# Altium PCB SPT3G_LCBoardRev0.PcbDoc (part 1 of 3)
Units mil, origin at the board's own origin, x right, y up, seen from the top; angles counter-clockwise.
Board outline 7438.98 x 1969 mil, 6 copper layers (Top Layer, Signal Layer 1, Internal Plane 1, Internal Plane 2, Signal Layer 2, Bottom Layer), stack 61.6 mil thick; 29 components, 149 nets, 701 pads, 136 vias.
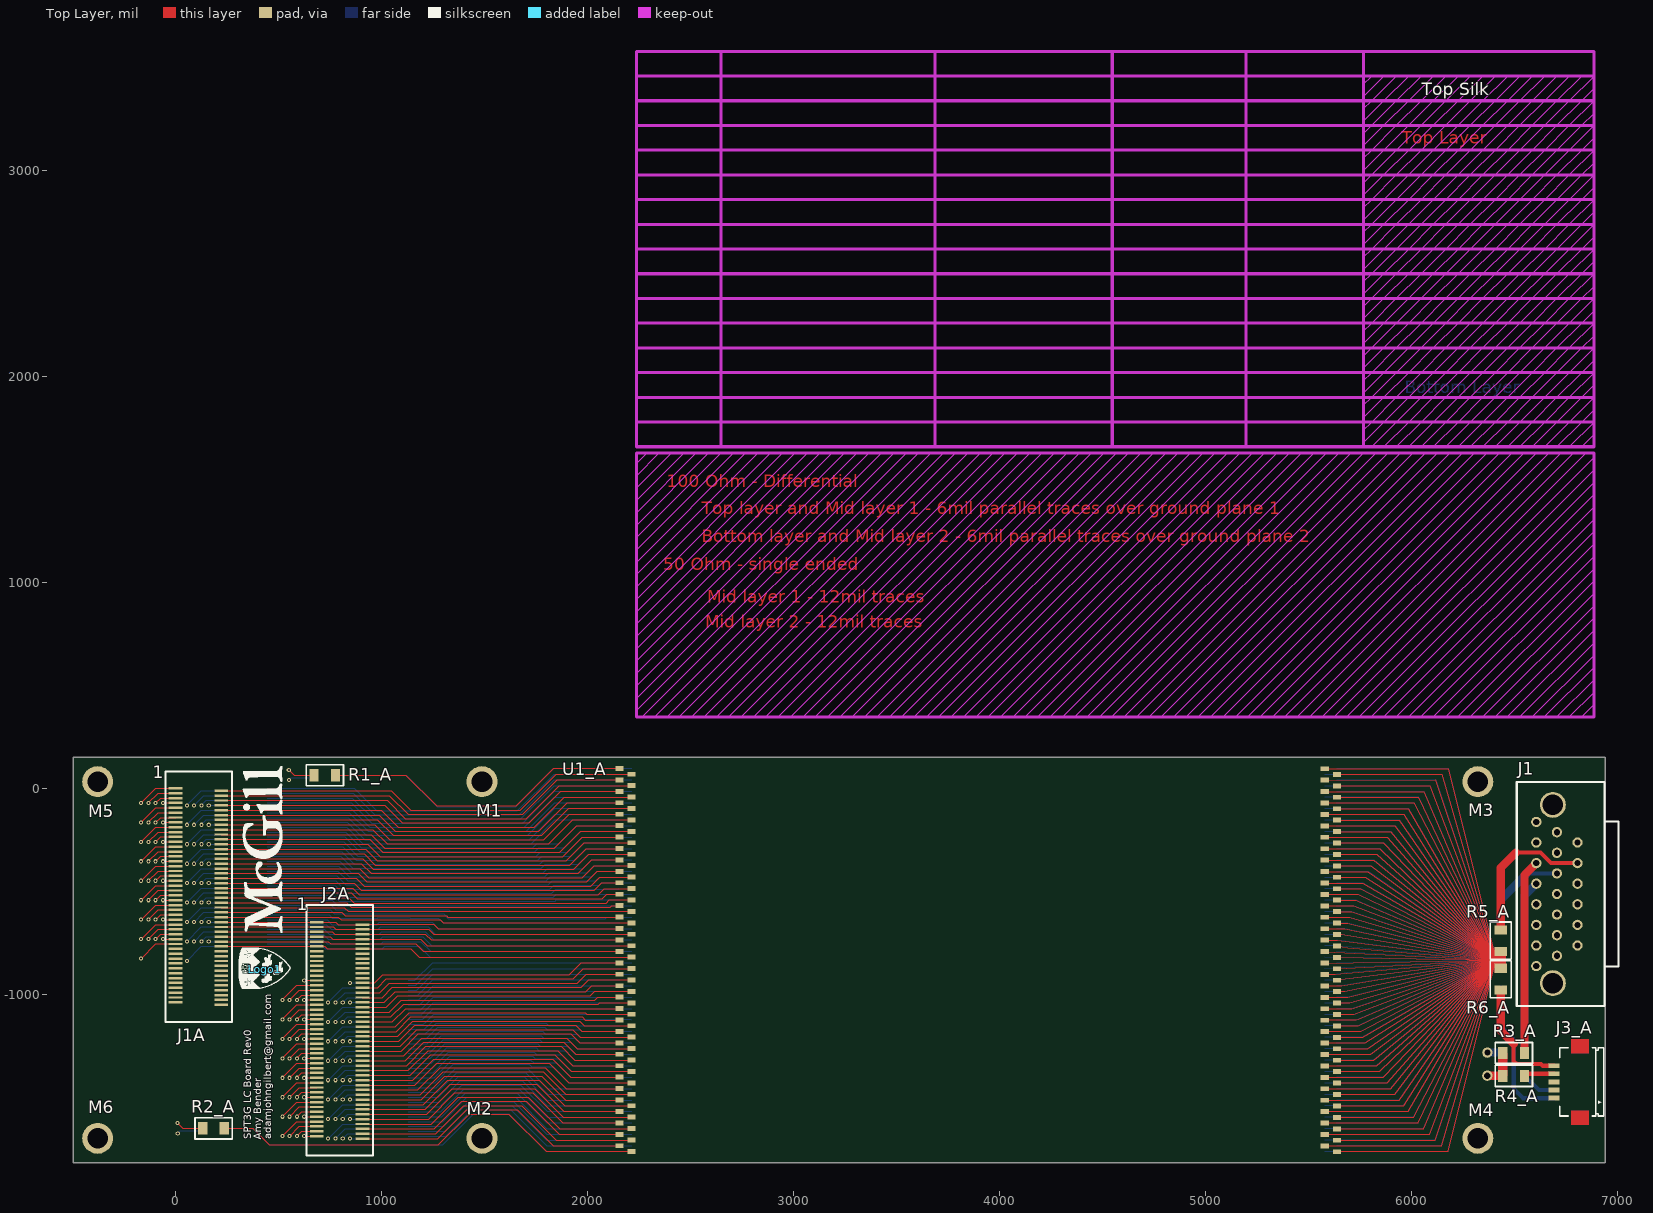
[diagram p0: Top Layer view]
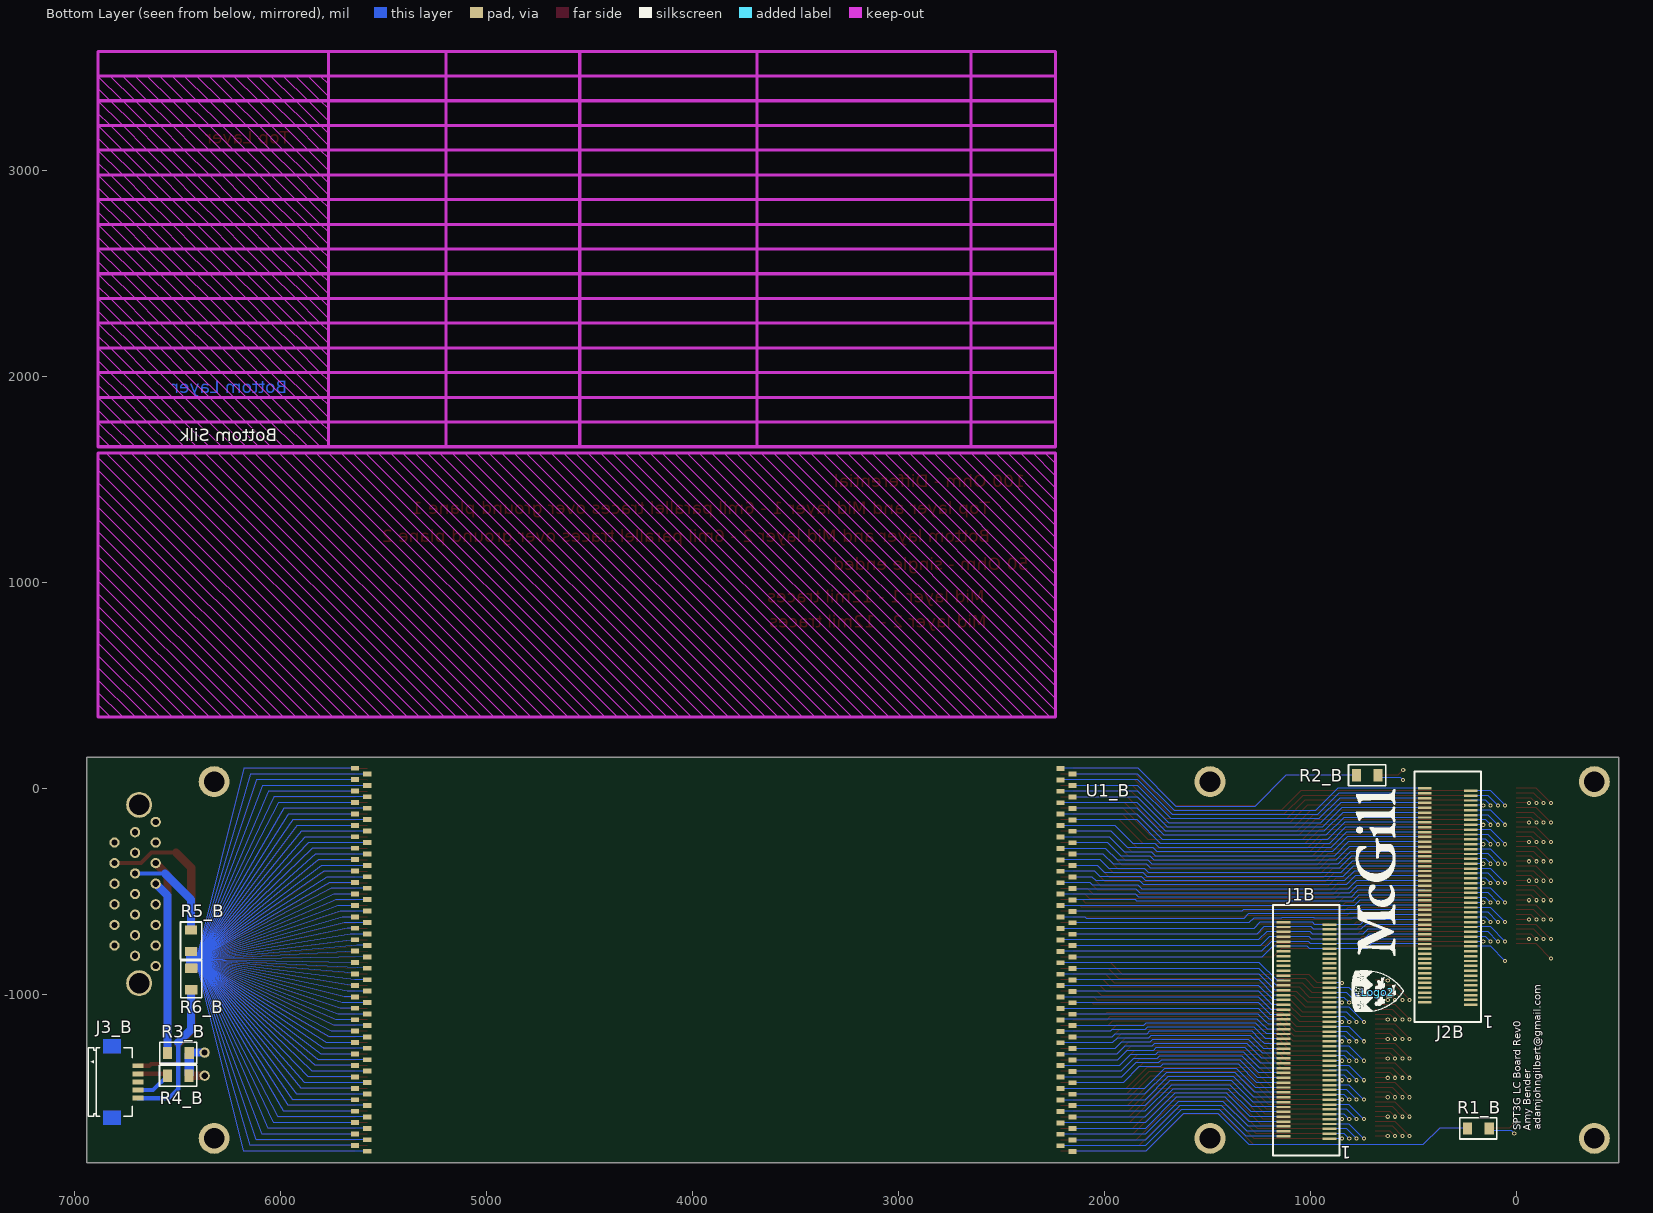
[diagram p1: Bottom Layer view, seen from below]
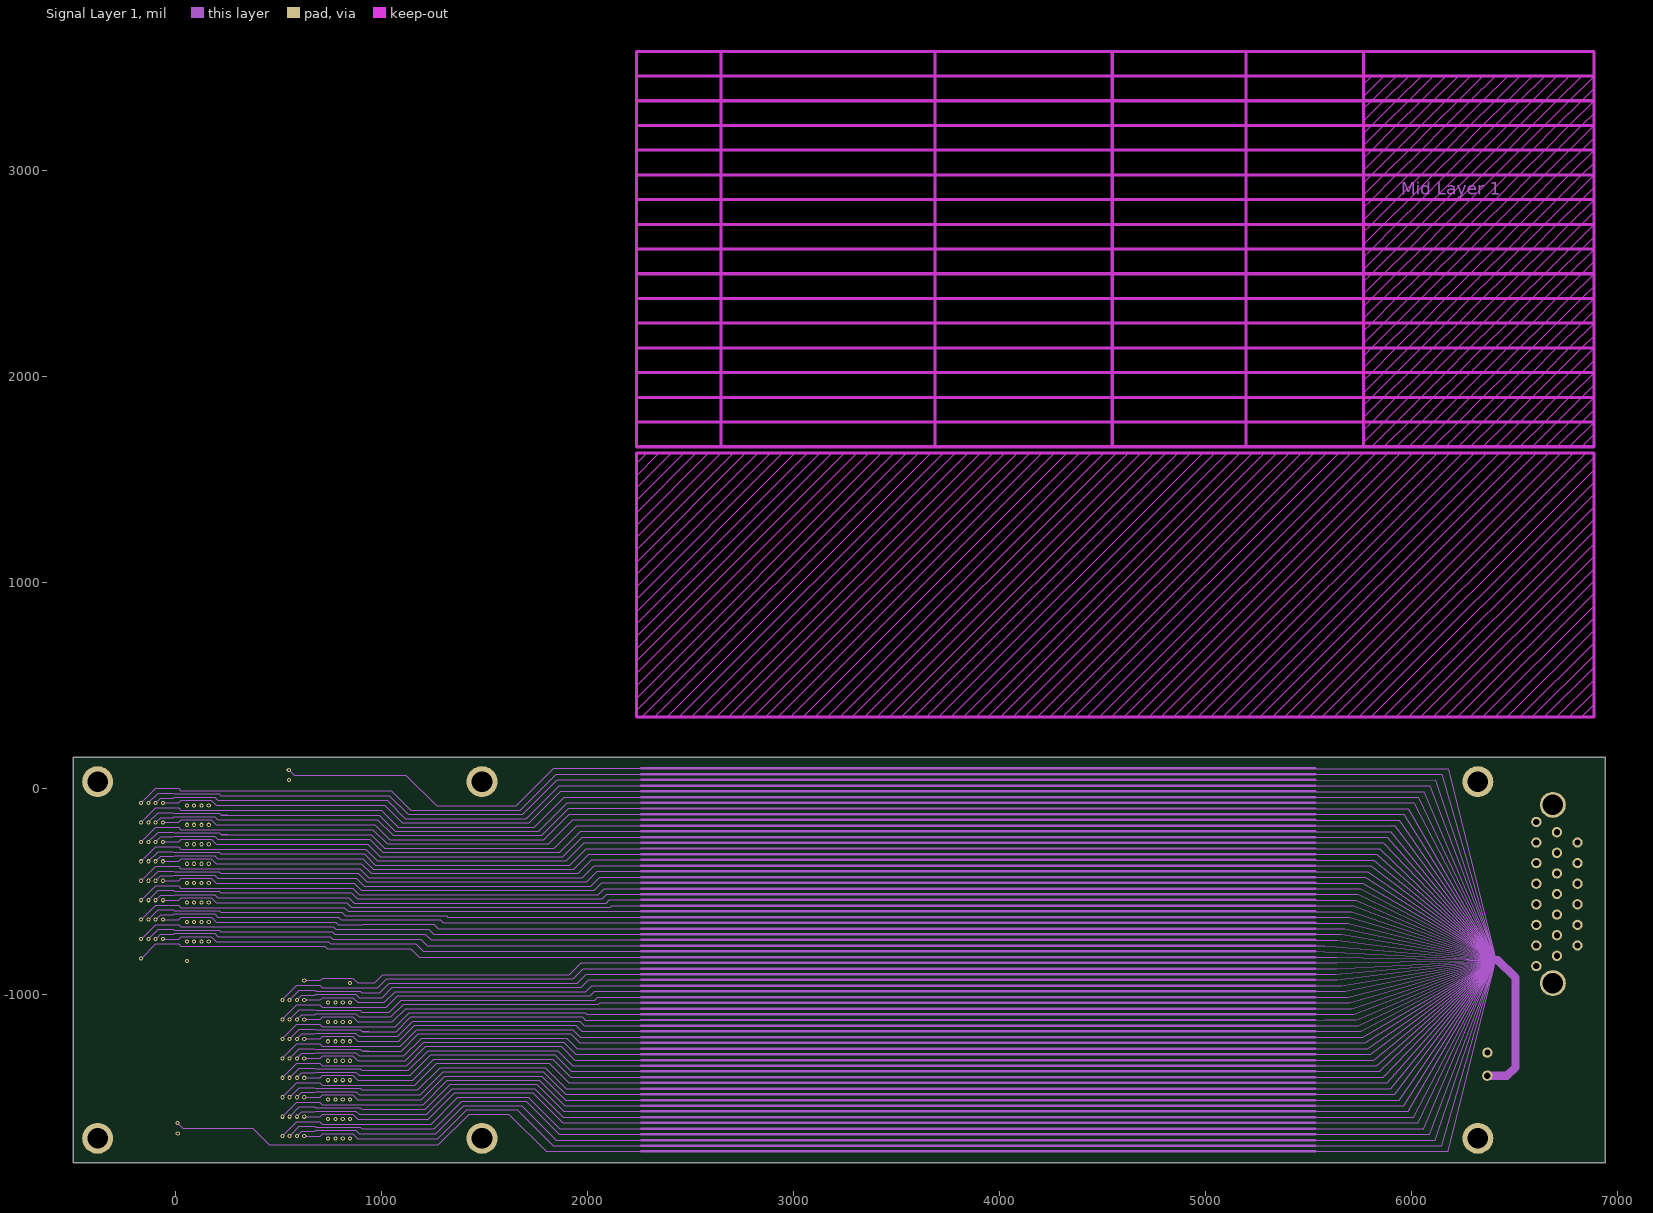
[diagram p2: Signal Layer 1]
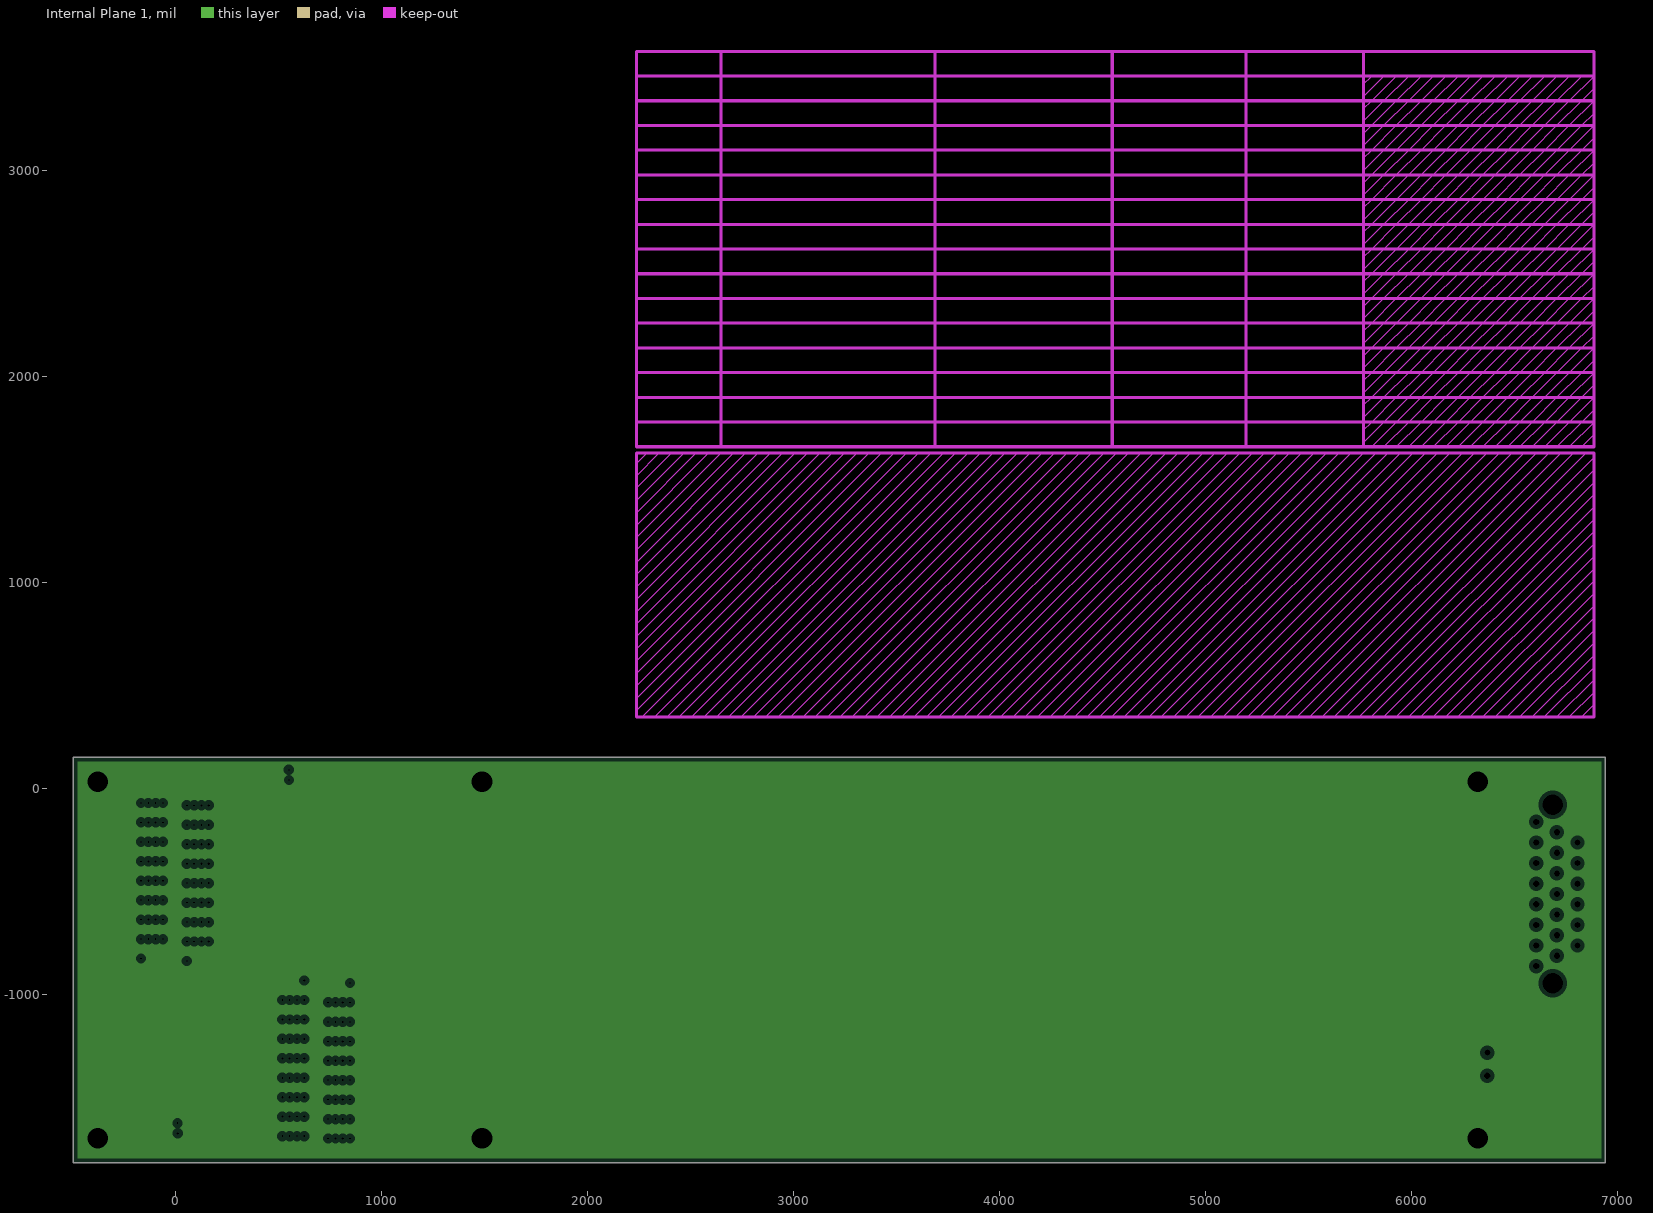
[diagram p3: Internal Plane 1, clearances drawn from the general rule]
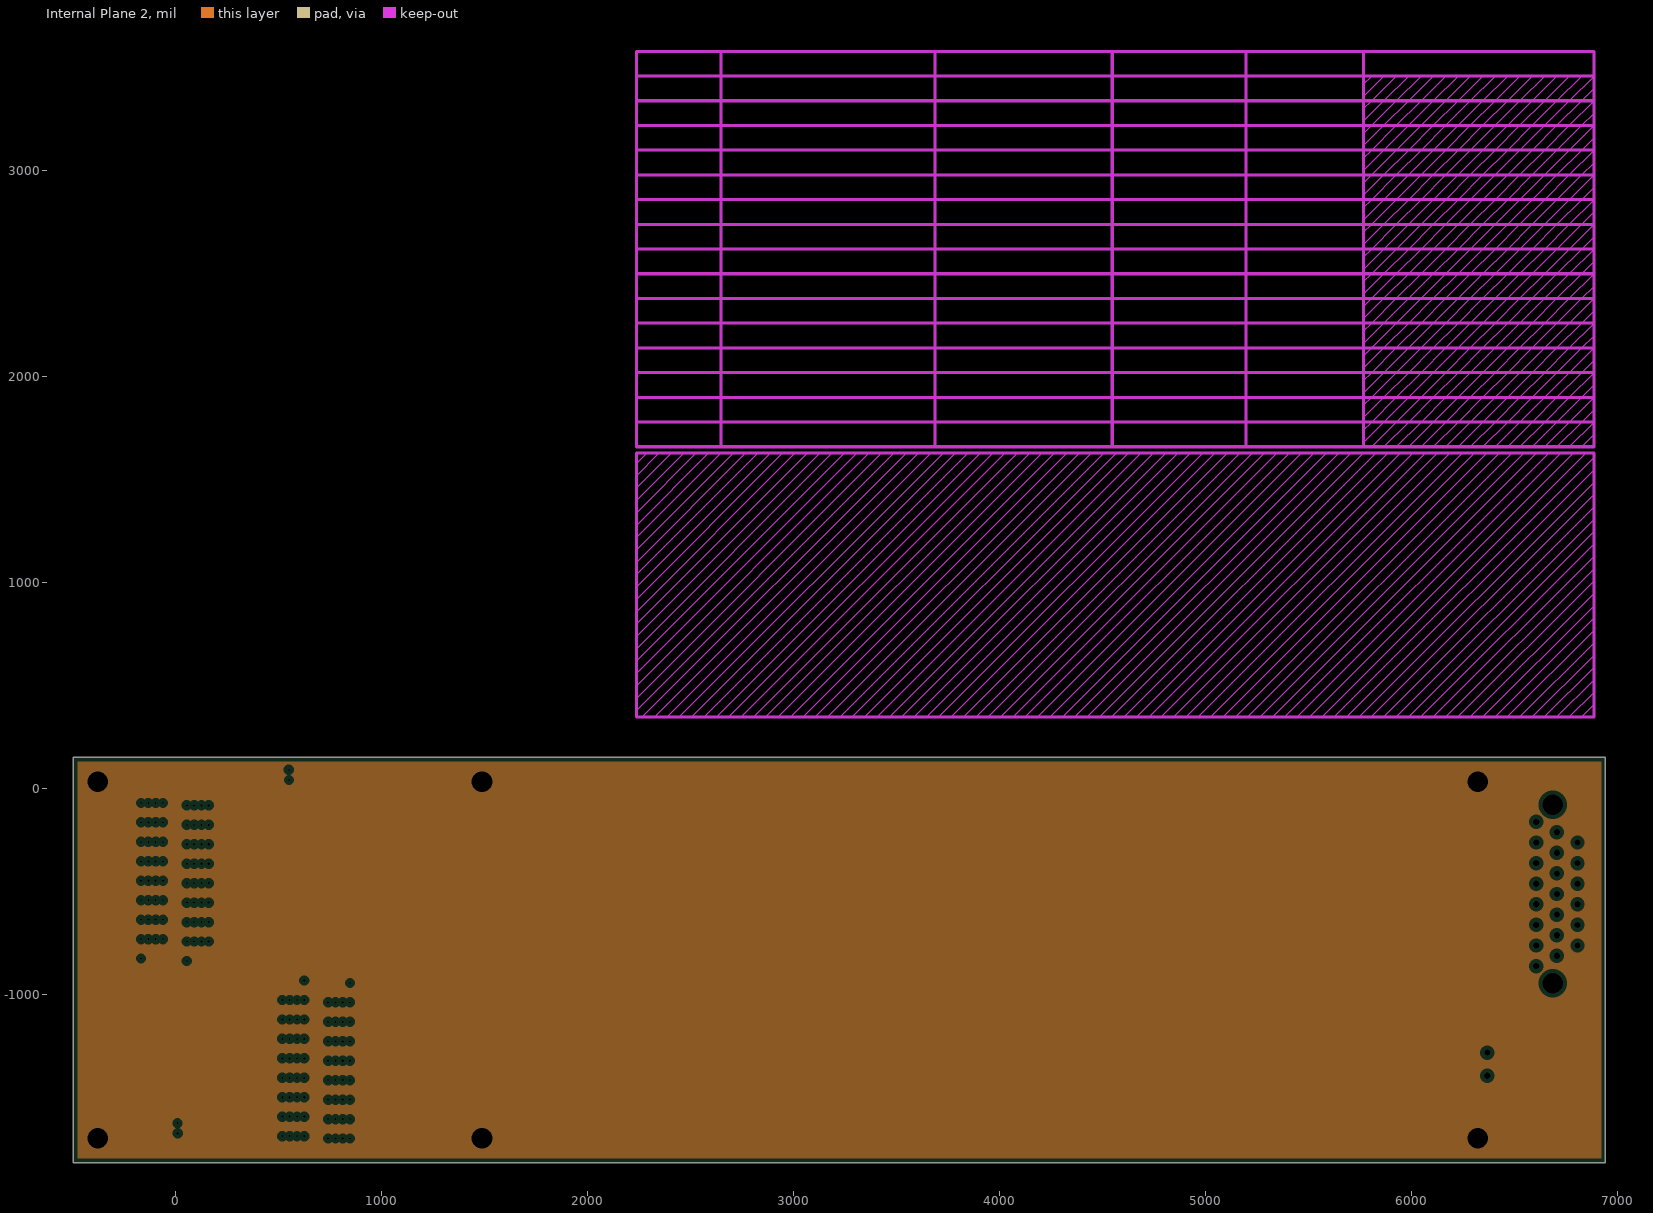
[diagram p4: Internal Plane 2, clearances drawn from the general rule]
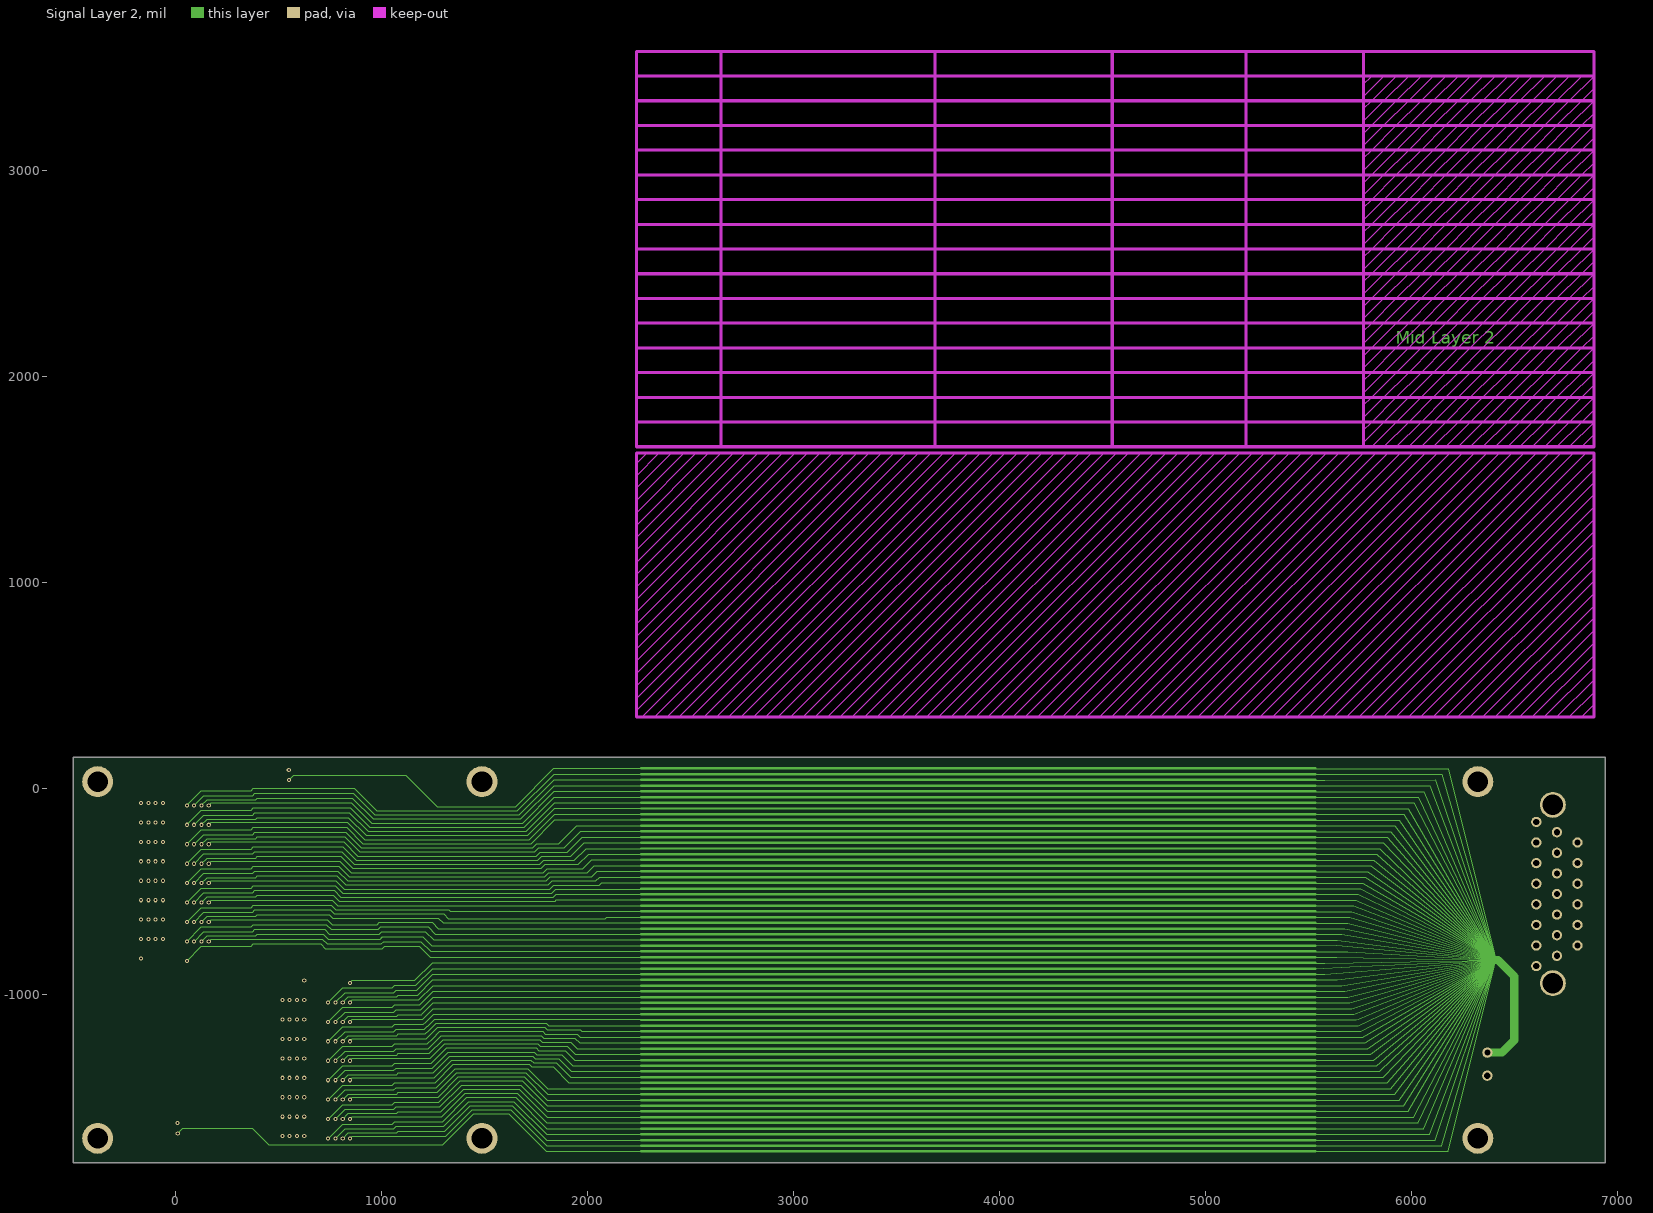
[diagram p5: Signal Layer 2]

## Layer stack, top to bottom
Top Solder: solder mask 0.4, Solder Resist, Dk 3.5
Top Layer: signal copper 1.4
Dielectric 1: core 4, FR-4, Dk 4.2
Signal Layer 1: signal copper 0.7
Dielectric 3: prepreg 9, Dk 4.2
Internal Plane 1: plane copper 0.7, net GND
Dielectric 4: core 30, Dk 4.2
Internal Plane 2: plane copper 0.7, net GND
Dielectric 5: prepreg 9, Dk 4.2
Signal Layer 2: signal copper 0.7
Dielectric 2: core 4, Dk 4.2
Bottom Layer: signal copper 1.4
Bottom Solder: solder mask 0.4, Solder Resist, Dk 3.5

## Board outline
-496.38,-1818.5 6942.6,-1818.5 6942.6,150.5 -496.38,150.5

## Design rules (kind name [scope] priority, off if disabled: settings)
Clearance [All] p1: gap=6
ComponentClearance [All] p1 off: gap=10 collisioncheckmode=3 verticalgap=10 showdistances=FALSE
HoleSize [All] p1: absolutevalues=TRUE maxlimit=200 minlimit=1 maxpercent=80.000 minpercent=20.000
MinimumSolderMaskSliver [All] p1: minsoldermaskwidth=3
PlaneClearance [All] p1: clearance=20
PlaneConnect MountingHoleRelief [(ObjectKind = 'Pad') And (Layer = 'MultiLayer') And (AsMils(HoleDiameter) = 120)] p1: planeconnectstyle=Direct reliefexpansion=20 reliefentries=4 reliefconductorwidth=30 reliefairgap=10
PlaneConnect [All] p2: planeconnectstyle=Relief reliefexpansion=20 reliefentries=4 reliefconductorwidth=10 reliefairgap=10
PolygonConnect [All] p1: connectstyle=Relief reliefconductorwidth=10 reliefentries=4 polygonreliefangle="90 Angle" airgapwidth=10
RoutingVias [All] p1: holewidth=28 width=50 viastyle="Through Hole" minholewidth=28 minwidth=50 maxholewidth=28 maxwidth=50
SilkToBoardRegionClearance [All] p1 off:
SilkToSilkClearance [All] p1: silktosilkclearance=0
SilkToSolderMaskClearance [IsPad] p1: minsilkscreentomaskgap=3 clearancetoexposedcopper=TRUE
SolderMaskExpansion [All] p1: expansion=4
UnpouredPolygon [All] p1: allowunpoured=FALSE
Width [All] p1: maxlimit=100 minlimit=3 preferedwidth=6
21 further rules are at their usual default settings.

## Classes and differential pairs
component class A: J3_A R1_A R2_A R3_A R4_A R5_A R6_A U1_A
component class B: J3_B R1_B R2_B R3_B R4_B R5_B R6_B U1_B
component class S1: J1A J2A
component class S2: J1B J2B
channel class LCs: A B
component class TopLevelSchem: J1 Logo1 Logo2 M1 M2 M3 M4 M5 M6

## Components (designator, comment, footprint, x,y, rotation, side; value= is the part's Value field where it differs from the comment)
J1 "Glenair MWDM2L-21SCBRP-.110" MWDM2L-21SCBRP-.110 6707.24,-213.17 r270 top
J1A "ZIF Connector" LCBOARD_ZIFCON#1 33.46,0 r270 top
J1B "ZIF Connector" LCBOARD_ZIFCON#2 941.89,-1700.79 r90 bottom
J2A "ZIF Connector" LCBOARD_ZIFCON#1 719.45,-649.61 r270 top
J2B "ZIF Connector" LCBOARD_ZIFCON#2 255.91,-1051.18 r90 bottom
J3_A "FH-12-5S-1SH(55)" FH-12-5S-1SH(55) 6820.77,-1425.96 r90 top (schematic designator J3)
J3_B "FH-12-5S-1SH(55)" FH-12-5S-1SH(55) 6820.77,-1425.7 r270 bottom (schematic designator J3)
Logo1 "McGillLogo1" McGillLogo1 432.2,-879.04 r90 top
Logo2 "McGillLogo1" McGillLogo1 674.38,-990.59 r90 bottom
M1 "MountingHole" MOUNTINGHOLE#1 1487.9,32.5 r0 top
M2 "MountingHole" MOUNTINGHOLE#1 1487.9,-1699.5 r0 top
M3 "MountingHole" MOUNTINGHOLE#1 6323.6,32.5 r0 top
M4 "MountingHole" MOUNTINGHOLE#1 6323.6,-1699.5 r0 top
M5 "MountingHole" MOUNTINGHOLE#2 -348.71,-58.7 r0 top
M6 "MountingHole" MOUNTINGHOLE#3 -342.9,-1631.21 r0 top
R1_A "Res1206" 1206 672,64 r0 top (schematic designator R1)
R1_B "Res1206" 1206 132.39,-1651.5 r0 bottom (schematic designator R1)
R2_A "Res1206" 1206 131.94,-1651.23 r0 top (schematic designator R2)
R2_B "Res1206" 1206 672.1,63.2 r0 bottom (schematic designator R2)
R3_A "Res1206" 1206 6444.69,-1285.09 r0 top (schematic designator R3)
R3_B "Res1206" 1206 6444.48,-1284.85 r0 bottom (schematic designator R3)
R4_A "Res1206" 1206 6444.75,-1396.59 r0 top (schematic designator R4)
R4_B "Res1206" 1206 6444.97,-1395.95 r0 bottom (schematic designator R4)
R5_A "Res1206" 1206 6435.05,-792.87 r90 top (schematic designator R5)
R5_B "Res1206" 1206 6435.44,-792.88 r90 bottom (schematic designator R5)
R6_A "Res1206" 1206 6435.05,-874.02 r270 top (schematic designator R6)
R6_B "Res1206" 1206 6435,-873.35 r270 bottom (schematic designator R6)
U1_A "LC68_wafer" 68xLC 2154.8,96.32 r0 top (schematic designator U1)
U1_B "LC68_wafer" 68xLC 2155,-1763 r0 bottom (schematic designator U1)

## Footprints (in the part's own frame and the unit in brackets; to place one, negate y for a bottom-side part, rotate by r counter-clockwise, add the part's x,y. Pads: shape width x height; smd on the part's side, far side on the other; paste and mask are expansions set on the pad)
68xLC [mm]
  rect 1x0.6 smd: 1(0,0) 2(1.5,-0.705) 3(0,-1.41) 4(1.5,-2.115) 5(0,-2.82) 6(1.5,-3.525) 7(0,-4.23) 8(1.5,-4.935) 9(0,-5.64) 10(1.5,-6.345) 11(0,-7.05) 12(1.5,-7.755) 13(0,-8.46) 14(1.5,-9.165) 15(0,-9.87) 16(1.5,-10.575) 17(0,-11.28) 18(1.5,-11.985) 19(0,-12.69) 20(1.5,-13.395) 21(0,-14.1) 22(1.5,-14.805) 23(0,-15.51) 24(1.5,-16.215) 25(0,-16.92) 26(1.5,-17.625) 27(0,-18.33) 28(1.5,-19.035) 29(0,-19.74) 30(1.5,-20.445) 31(0,-21.15) 32(1.5,-21.855) 33(0,-22.56) 34(1.5,-23.265) 35(0,-23.97) 36(1.5,-24.675) 37(0,-25.38) 38(1.5,-26.085) 39(0,-26.79) 40(1.5,-27.495) 41(0,-28.2) 42(1.5,-28.905) 43(0,-29.61) 44(1.5,-30.315) 45(0,-31.02) 46(1.5,-31.725) 47(0,-32.43) 48(1.5,-33.135) 49(0,-33.84) 50(1.5,-34.545) 51(0,-35.25) 52(1.5,-35.955) 53(0,-36.66) 54(1.5,-37.365) 55(0,-38.07) 56(1.5,-38.775) 57(0,-39.48) 58(1.5,-40.185) 59(0,-40.89) 60(1.5,-41.595) 61(0,-42.3) 62(1.5,-43.005) 63(0,-43.71) 64(1.5,-44.415) 65(0,-45.12) 66(1.5,-45.825) 67(0,-46.53) 68(1.5,-47.235) 69(88.5,-47.26) 70(87,-46.555) 71(88.5,-45.85) 72(87,-45.145) 73(88.5,-44.44) 74(87,-43.735) 75(88.5,-43.03) 76(87,-42.325) 77(88.5,-41.62) 78(87,-40.915) 79(88.5,-40.21) 80(87,-39.505) 81(88.5,-38.8) 82(87,-38.095) 83(88.5,-37.39) 84(87,-36.685) 85(88.5,-35.98) 86(87,-35.275) 87(88.5,-34.57) 88(87,-33.865) 89(88.5,-33.16) 90(87,-32.455) 91(88.5,-31.75) 92(87,-31.045) 93(88.5,-30.34) 94(87,-29.635) 95(88.5,-28.93) 96(87,-28.225) 97(88.5,-27.52) 98(87,-26.815) 99(88.5,-26.11) 100(87,-25.405) 101(88.5,-24.7) 102(87,-23.995) 103(88.5,-23.29) 104(87,-22.585) 105(88.5,-21.88) 106(87,-21.175) 107(88.5,-20.47) 108(87,-19.765) 109(88.5,-19.06) 110(87,-18.355) 111(88.5,-17.65) 112(87,-16.945) 113(88.5,-16.24) 114(87,-15.535) 115(88.5,-14.83) 116(87,-14.125) 117(88.5,-13.42) 118(87,-12.715) 119(88.5,-12.01) 120(87,-11.305) 121(88.5,-10.6) 122(87,-9.895) 123(88.5,-9.19) 124(87,-8.485) 125(88.5,-7.78) 126(87,-7.075) 127(88.5,-6.37) 128(87,-5.665) 129(88.5,-4.96) 130(87,-4.255) 131(88.5,-3.55) 132(87,-2.845) 133(88.5,-2.14) 134(87,-1.435) 135(88.5,-0.73) 136(87,-0.025)
  body extent 2.32,-47.55 86.18,0.29, height 2
1206 [mil]
  rect 45x60 smd: 1(0,0) 2(105,0)
  silkscreen extent -37,-51 144,51
FH-12-5S-1SH(55) [mil] "FH-12-5S-1SH(55)"
  rect 24x52 smd: 1(79,128) 2(40,128) 3(0,128) 4(-39.37,128) 5(-78.74,128)
  Top Layer region: 209,44 138,44 138,-43.31 209,-43.31
  Top Layer region: -137.79,44 -208.66,44 -208.66,-43.31 -137.79,-43.31
  silkscreen extent -165,-114 166,99
LCBOARD_ZIFCON#1 [mm]
  rect 0.3x1.7 smd: 1(0,-0.85) 2(0.3,4.8) 3(0.6,-0.85) 4(0.9,4.8) 5(1.2,-0.85) 6(1.5,4.8) 7(1.8,-0.85) 8(2.1,4.8) 9(2.4,-0.85) 10(2.7,4.8) 11(3,-0.85) 12(3.3,4.8) 13(3.6,-0.85) 14(3.9,4.8) 15(4.2,-0.85) 16(4.5,4.8) 17(4.8,-0.85) 18(5.1,4.8) 19(5.4,-0.85) 20(5.7,4.8) 21(6,-0.85) 22(6.3,4.8) 23(6.6,-0.85) 24(6.9,4.8) 25(7.2,-0.85) 26(7.5,4.8) 27(7.8,-0.85) 28(8.1,4.8) 29(8.4,-0.85) 30(8.7,4.8) 31(9,-0.85) 32(9.3,4.8) 33(9.6,-0.85) 34(9.9,4.8) 35(10.2,-0.85) 36(10.5,4.8) 37(10.8,-0.85) 38(11.1,4.8) 39(11.4,-0.85) 40(11.7,4.8) 41(12,-0.85) 42(12.3,4.8) 43(12.6,-0.85) 44(12.9,4.8) 45(13.2,-0.85) 46(13.5,4.8) 47(13.8,-0.85) 48(14.1,4.8) 49(14.4,-0.85) 50(14.7,4.8) 51(15,-0.85) 52(15.3,4.8) 53(15.6,-0.85) 54(15.9,4.8) 55(16.2,-0.85) 56(16.5,4.8) 57(16.8,-0.85) 58(17.1,4.8) 59(17.4,-0.85) 60(17.7,4.8) 61(18,-0.85) 62(18.3,4.8) 63(18.6,-0.85) 64(18.9,4.8) 65(19.2,-0.85) 66(19.5,4.8) 67(19.8,-0.85) 68(20.1,4.8) 69(20.4,-0.85) 70(20.7,4.8) 71(21,-0.85) 72(21.3,4.8) 73(21.6,-0.85) 74(21.9,4.8) 75(22.2,-0.85) 76(22.5,4.8) 77(22.8,-0.85) 78(23.1,4.8) 79(23.4,-0.85) 80(23.7,4.8) 81(24,-0.85) 82(24.3,4.8) 83(24.6,-0.85) 84(24.9,4.8) 85(25.2,-0.85) 86(25.5,4.8) 87(25.8,-0.85) 88(26.1,4.8) 89(26.4,-0.85) 90(26.7,4.8)
  round 0.5 on Top Overlay: 2(-2.3,-2.4)
  silkscreen extent -2.1,-2.1 28.8,6.1, body extent -2.1,-1.73 28.8,5.68, height 6.5
LCBOARD_ZIFCON#2 [mm]
  rect 0.3x1.7 smd: 1(0,-0.85) 2(0.3,4.8) 3(0.6,-0.85) 4(0.9,4.8) 5(1.2,-0.85) 6(1.5,4.8) 7(1.8,-0.85) 8(2.1,4.8) 9(2.4,-0.85) 10(2.7,4.8) 11(3,-0.85) 12(3.3,4.8) 13(3.6,-0.85) 14(3.9,4.8) 15(4.2,-0.85) 16(4.5,4.8) 17(4.8,-0.85) 18(5.1,4.8) 19(5.4,-0.85) 20(5.7,4.8) 21(6,-0.85) 22(6.3,4.8) 23(6.6,-0.85) 24(6.9,4.8) 25(7.2,-0.85) 26(7.5,4.8) 27(7.8,-0.85) 28(8.1,4.8) 29(8.4,-0.85) 30(8.7,4.8) 31(9,-0.85) 32(9.3,4.8) 33(9.6,-0.85) 34(9.9,4.8) 35(10.2,-0.85) 36(10.5,4.8) 37(10.8,-0.85) 38(11.1,4.8) 39(11.4,-0.85) 40(11.7,4.8) 41(12,-0.85) 42(12.3,4.8) 43(12.6,-0.85) 44(12.9,4.8) 45(13.2,-0.85) 46(13.5,4.8) 47(13.8,-0.85) 48(14.1,4.8) 49(14.4,-0.85) 50(14.7,4.8) 51(15,-0.85) 52(15.3,4.8) 53(15.6,-0.85) 54(15.9,4.8) 55(16.2,-0.85) 56(16.5,4.8) 57(16.8,-0.85) 58(17.1,4.8) 59(17.4,-0.85) 60(17.7,4.8) 61(18,-0.85) 62(18.3,4.8) 63(18.6,-0.85) 64(18.9,4.8) 65(19.2,-0.85) 66(19.5,4.8) 67(19.8,-0.85) 68(20.1,4.8) 69(20.4,-0.85) 70(20.7,4.8) 71(21,-0.85) 72(21.3,4.8) 73(21.6,-0.85) 74(21.9,4.8) 75(22.2,-0.85) 76(22.5,4.8) 77(22.8,-0.85) 78(23.1,4.8) 79(23.4,-0.85) 80(23.7,4.8) 81(24,-0.85) 82(24.3,4.8) 83(24.6,-0.85) 84(24.9,4.8) 85(25.2,-0.85) 86(25.5,4.8) 87(25.8,-0.85) 88(26.1,4.8) 89(26.4,-0.85) 90(26.7,4.8)
  round 0.5 on Bottom Overlay: 2(-2.3,-2.4)
  silkscreen extent -2.1,-2.1 28.8,6.1, body extent -2.1,-1.73 28.8,5.68, height 6.5
McGillLogo1 [mil] "McGillLogo"
  silkscreen extent -95,-127 986,124
MOUNTINGHOLE#1 [mil] "Mounting Hole"
  round 150 hole 100: 0(0,0)
MOUNTINGHOLE#2 [mil] "Mounting Hole"
  round 150 hole 100: 0(-29.55,91.18)
MOUNTINGHOLE#3 [mil] "Mounting Hole"
  round 150 hole 100: 0(-35.37,-68.28)
MWDM2L-21SCBRP-.110 [mil] "MWDM2L-21SCBRP-.110"
  round 50 hole 30: 1(600,0) 2(550,100) 3(450,100) 4(400,0) 5(350,100) 6(250,100) 7(200,0) 8(150,100) 9(100,0) 10(50,100) 11(0,0) 12(650,-100) 13(550,-100) 14(500,0) 15(450,-100) 16(350,-100) 17(300,0) 18(250,-100) 19(150,-100) 20(50,-100) 21(-50,-100)
  round 125.98 hole 100: MH1(-133,-20) MH2(733,-20)
  silkscreen extent -243,-195 843,300, body extent -242,-176 843,422, height 310

## Part data
J1: library part MWDM2L-21SCBRP-.110, "Glenair 21pin RA Micro Dsub socket - MWDM2L-21SCBRP-.110"
J1A J1B J2A J2B: library part LCboard_FH16-90S-0.3SHW(05)
Logo1 Logo2: library part Logo
R1_A R1_B R2_A R2_B R3_A R3_B R4_A R4_B R5_A R5_B R6_A R6_B: "Resistor"
U1_A U1_B: library part LC68Wafer, "Gold bonded integrated LC"

## Free pads (board coordinates)
  round 50 hole 30: 0(6369.25,-1395.47) 0(6369.59,-1283.27)

## Via types
v1: diameter 20, hole 10, Top Layer to Bottom Layer, 136 vias

## Nets (pads, with @x,y where several pads share a name; then routed paths per layer and width w, separated by ;. In a path a pad name is that pad's centre, name@x,y a point inside that pad or via, vN(x,y) a via of type N, cw(c..) or ccw(c..) an arc to the next point about the centre after c; other vN are vias at no path point)
BOLORETURN_A: J1A.1 J1A.3 J1A.5 J1A.7 J1A.9 J1A.11 J1A.13 J1A.15 J1A.17 J1A.19 J1A.21 J1A.23 J1A.25 J1A.27 J1A.29 J1A.31 J1A.33 J1A.35 J1A.37 J1A.39 J1A.41 J1A.43 J1A.45 J1A.47 J1A.49 J1A.51 J1A.53 J1A.55 J1A.57 J1A.59 J1A.61 J1A.63 J1A.65 J2A.25 J2A.27 J2A.29 J2A.31 J2A.33 J2A.35 J2A.37 J2A.39 J2A.41 J2A.43 J2A.45 J2A.47 J2A.49 J2A.51 J2A.53 J2A.55 J2A.57 J2A.59 J2A.61 J2A.63 J2A.65 J2A.67 J2A.69 J2A.71 J2A.73 J2A.75 J2A.77 J2A.79 J2A.81 J2A.83 J2A.85 J2A.87 J2A.89 pad.0@6369.25,-1395.47 R1_A.1 R2_A.1 R3_A.1 R4_A.1 | length 452987.2
  Top Layer w6: v1(-167.32,-826.77) -96.46,-755.91 J1A.65@0,-755.91 ; v1(-167.32,-732.28) -96.46,-661.42 J1A.57@0,-661.42 ; v1(-167.32,-637.8) -96.46,-566.93 J1A.49@0,-566.93 ; v1(-167.32,-543.31) -96.46,-472.44 J1A.41@0,-472.44 ; v1(-167.32,-448.82) -96.46,-377.95 J1A.33@0,-377.95 ; v1(-167.32,-354.33) -96.46,-283.46 J1A.25@0,-283.46 ; v1(-167.32,-259.84) -96.46,-188.98 J1A.17@0,-188.98 ; v1(-167.32,-165.35) -96.46,-94.49 J1A.9@0,-94.49 ; v1(-167.32,-70.87) -96.46,0 J1A.1@0,0 ; v1(-131.89,-732.28) -84.65,-685.04 J1A.59@0,-685.04 ; v1(-131.89,-637.8) -84.65,-590.55 J1A.51@0,-590.55 ; v1(-131.89,-543.31) -84.65,-496.06 J1A.43@0,-496.06 ; v1(-131.89,-448.82) -84.65,-401.57 J1A.35@0,-401.57 ; v1(-131.89,-354.33) -84.65,-307.09 J1A.27@0,-307.09 ; v1(-131.89,-259.84) -84.65,-212.6 J1A.19@0,-212.6 ; v1(-131.89,-165.35) -84.65,-118.11 J1A.11@0,-118.11 ; v1(-131.89,-70.87) -84.65,-23.62 J1A.3@0,-23.62 ; v1(-96.46,-732.28) -72.83,-708.66 J1A.61@0,-708.66 ; v1(-96.46,-637.8) -72.83,-614.17 J1A.53@0,-614.17 ; v1(-96.46,-543.31) -72.83,-519.69 J1A.45@0,-519.68 ; v1(-96.46,-448.82) -72.83,-425.2 J1A.37@0,-425.2 ; v1(-96.46,-354.33) -72.83,-330.71 J1A.29@0,-330.71 ; v1(-96.46,-259.84) -72.83,-236.22 J1A.21@0,-236.22 ; v1(-96.46,-165.35) -72.83,-141.73 J1A.13@0,-141.73 ; v1(-96.46,-70.87) -72.83,-47.24 J1A.5@0,-47.24 ; v1(-61.02,-732.28) J1A.63@0,-732.28 ; v1(-61.02,-637.8) J1A.55@0,-637.8 ; v1(-61.02,-543.31) J1A.47@0,-543.31 ; v1(-61.02,-448.82) J1A.39@0,-448.82 ; v1(-61.02,-354.33) J1A.31@0,-354.33 ; v1(-61.02,-259.84) J1A.23@0,-259.84 ; v1(-61.02,-165.35) J1A.15@0,-165.35 ; v1(-61.02,-70.87) J1A.7@0,-70.87 ; v1(9.86,-1625.7) 35.4,-1651.23 R2_A.1@131.94,-1651.23 ; v1(518.66,-1688.98) 589.53,-1618.11 J2A.83@685.98,-1618.11 ; v1(518.66,-1594.49) 589.53,-1523.62 J2A.75@685.98,-1523.62 ; v1(518.66,-1500) 589.53,-1429.13 J2A.67@685.98,-1429.13 ; v1(518.66,-1405.51) 589.53,-1334.65 J2A.59@685.98,-1334.65 ; v1(518.66,-1311.02) 589.53,-1240.16 J2A.51@685.98,-1240.16 ; v1(518.66,-1216.54) 589.53,-1145.67 J2A.43@685.98,-1145.67 ; v1(518.66,-1122.05) 589.53,-1051.18 J2A.35@685.98,-1051.18 ; v1(518.66,-1027.56) 589.53,-956.69 J2A.27@685.98,-956.69 ; v1(549.92,89.53) 575.45,64 R1_A.1@672,64 ; v1(554.09,-1688.98) 601.34,-1641.73 J2A.85@685.98,-1641.73 ; v1(554.09,-1594.49) 601.34,-1547.24 J2A.77@685.98,-1547.24 ; v1(554.09,-1500) 601.34,-1452.76 J2A.69@685.98,-1452.76 ; v1(554.09,-1405.51) 601.34,-1358.27 J2A.61@685.98,-1358.27 ; v1(554.09,-1311.02) 601.34,-1263.78 J2A.53@685.98,-1263.78 ; v1(554.09,-1216.54) 601.34,-1169.29 J2A.45@685.98,-1169.29 ; v1(554.09,-1122.05) 601.34,-1074.8 J2A.37@685.98,-1074.8 ; v1(554.09,-1027.56) 601.34,-980.31 J2A.29@685.98,-980.31 ; v1(589.53,-1688.98) 613.15,-1665.35 J2A.87@685.98,-1665.35 ; v1(589.53,-1594.49) 613.15,-1570.87 J2A.79@685.98,-1570.87 ; v1(589.53,-1500) 613.15,-1476.38 J2A.71@685.98,-1476.38 ; v1(589.53,-1405.51) 613.15,-1381.89 J2A.63@685.98,-1381.89 ; v1(589.53,-1311.02) 613.15,-1287.4 J2A.55@685.98,-1287.4 ; v1(589.53,-1216.54) 613.15,-1192.91 J2A.47@685.98,-1192.91 ; v1(589.53,-1122.05) 613.15,-1098.43 J2A.39@685.98,-1098.43 ; v1(589.53,-1027.56) 613.15,-1003.94 J2A.31@685.98,-1003.94 ; v1(624.96,-1688.98) J2A.89@685.98,-1688.98 ; v1(624.96,-1594.49) J2A.81@685.98,-1594.49 ; v1(624.96,-1500) J2A.73@685.98,-1500 ; v1(624.96,-1405.51) J2A.65@685.98,-1405.51 ; v1(624.96,-1311.02) J2A.57@685.98,-1311.02 ; v1(624.96,-1216.54) J2A.49@685.98,-1216.54 ; v1(624.96,-1122.05) J2A.41@685.98,-1122.05 ; v1(624.96,-1027.56) J2A.33@685.98,-1027.56 ; v1(624.96,-933.07) J2A.25@685.98,-933.07 ; R4_A.1@6443.63,-1395.47 R4_A.1@6444.75,-1396.59
  Top Layer w40: pad.0@6369.25,-1395.47 R4_A.1@6443.63,-1395.47
  Signal Layer 1 w6: v1(-167.32,-826.77) -96.46,-755.91 14.49,-755.91 26.3,-767.72 252.48,-767.72 ; v1(-167.32,-732.28) -96.46,-661.42 14.49,-661.42 26.3,-673.23 252.48,-673.23 ; v1(-167.32,-637.8) -96.46,-566.93 14.49,-566.93 26.3,-578.74 252.48,-578.74 ; v1(-167.32,-543.31) -96.46,-472.44 14.49,-472.44 26.3,-484.25 252.48,-484.25 ; v1(-167.32,-448.82) -96.46,-377.95 14.49,-377.95 26.3,-389.76 252.48,-389.76 ; v1(-167.32,-354.33) -96.46,-283.46 14.49,-283.46 26.3,-295.28 923.46,-295.28 980.17,-351.99 1896.8,-351.99 1984.28,-264.51 2260,-264.51 ; v1(-167.32,-259.84) -96.46,-188.98 14.49,-188.98 26.3,-200.79 252.48,-200.79 ; v1(-167.32,-165.35) -96.46,-94.49 14.49,-94.49 26.3,-106.3 252.48,-106.3 ; v1(-167.32,-70.87) -96.46,0 14.49,0 26.3,-11.81 1047.08,-11.81 1141.38,-106.11 1673.08,-106.11 1847.75,68.56 2260,68.56 ; v1(-131.89,-732.28) -84.65,-685.04 -10,-685.04 -6.06,-688.98 211.84,-688.98 219.36,-696.5 252.48,-696.5 ; v1(-131.89,-637.8) -84.65,-590.55 -10,-590.55 -6.06,-594.49 211.84,-594.49 219.36,-602.01 252.48,-602.01 ; v1(-131.89,-543.31) -84.65,-496.06 -10,-496.06 -6.06,-500 211.84,-500 219.36,-507.52 252.48,-507.52 ; v1(-131.89,-448.82) -84.65,-401.57 -10,-401.57 -6.06,-405.51 211.84,-405.51 219.36,-413.04 252.48,-413.04 ; v1(-131.89,-354.33) -84.65,-307.09 -10,-307.09 -6.06,-311.02 211.84,-311.02 219.36,-318.55 252.48,-318.55 ; v1(-131.89,-259.84) -84.65,-212.6 -10,-212.6 -6.06,-216.54 211.84,-216.54 219.36,-224.06 252.48,-224.06 ; v1(-131.89,-165.35) -84.65,-118.11 -10,-118.11 -6.06,-122.05 211.84,-122.05 219.36,-129.57 252.48,-129.57 ; v1(-131.89,-70.87) -84.65,-23.62 -10,-23.62 -6.06,-27.56 211.84,-27.56 219.36,-35.08 252.48,-35.08 ; v1(-96.46,-732.28) -72.83,-708.66 -10,-708.66 -6.06,-704.72 189.93,-704.72 205.68,-720.47 252.48,-720.47 ; v1(-96.46,-637.8) -72.83,-614.17 -10,-614.17 -6.06,-610.24 189.93,-610.24 205.68,-625.98 252.48,-625.98 ; v1(-96.46,-543.31) -72.83,-519.69 -10,-519.69 -6.06,-515.75 189.93,-515.75 205.68,-531.5 252.48,-531.5 ; v1(-96.46,-448.82) -72.83,-425.2 -10,-425.2 -6.06,-421.26 189.93,-421.26 205.68,-437.01 877.8,-437.01 915.72,-474.93 2015.01,-474.93 2058.89,-431.05 2260,-431.05 ; v1(-96.46,-354.33) -72.83,-330.71 -10,-330.71 -6.06,-326.77 189.93,-326.77 205.68,-342.52 910.09,-342.52 960.54,-392.97 1933.02,-392.97 2005.97,-320.02 2260,-320.02 ; v1(-96.46,-259.84) -72.83,-236.22 -10,-236.22 -6.06,-232.28 189.93,-232.28 205.68,-248.03 252.48,-248.03 ; v1(-96.46,-165.35) -72.83,-141.73 -10,-141.73 -6.06,-137.8 189.93,-137.8 205.68,-153.54 980.61,-153.54 1056.11,-229.05 1777.38,-229.05 1908.45,-97.98 2260,-97.98 ; v1(-96.46,-70.87) -72.83,-47.24 -10,-47.24 -6.06,-43.31 189.93,-43.31 205.68,-59.06 1027.71,-59.06 1115.74,-147.09 1703.87,-147.09 1864,13.05 2260,13.05 ; v1(-61.02,-732.28) 16.23,-732.28 28.04,-720.47 174.04,-720.47 197.66,-744.09 252.48,-744.09 ; v1(-61.02,-637.8) 16.23,-637.8 28.04,-625.98 174.04,-625.98 197.66,-649.61 252.48,-649.61 ; v1(-61.02,-543.31) 16.23,-543.31 28.04,-531.5 174.04,-531.5 197.66,-555.12 831.69,-555.12 853.95,-577.38 2109.68,-577.38 2117.23,-569.83 2260,-569.83 ; v1(-61.02,-448.82) 16.23,-448.82 28.04,-437.01 174.04,-437.01 197.66,-460.63 252.48,-460.63 ; v1(-61.02,-354.33) 16.23,-354.33 28.04,-342.52 174.04,-342.52 197.66,-366.14 252.48,-366.14 ; v1(-61.02,-259.84) 16.23,-259.84 28.04,-248.03 174.04,-248.03 197.66,-271.65 252.48,-271.65 ; v1(-61.02,-165.35) 16.23,-165.35 28.04,-153.54 174.04,-153.54 197.66,-177.17 252.48,-177.17 ; v1(-61.02,-70.87) 16.23,-70.87 28.04,-59.06 174.04,-59.06 197.66,-82.68 252.48,-82.68 ; v1(9.86,-1625.7) 35.4,-1651.23 374.8,-1651.23 455.44,-1731.87 1276.54,-1731.87 1427.02,-1581.39 1618.95,-1581.39 1800.88,-1763.33 2260,-1763.33 ; 222.44,-767.72 685.98,-767.72 724.9,-767.72 736.71,-779.53 1143.07,-779.53 1183.17,-819.63 2260,-819.63 ; 222.44,-744.09 685.98,-744.09 741.88,-744.09 753.69,-755.91 1167.23,-755.91 1203.2,-791.87 2260,-791.87 ; 222.44,-720.47 685.98,-720.47 752.09,-720.47 763.9,-732.28 1190.68,-732.28 1222.51,-764.12 2260,-764.12 ; 222.44,-696.85 685.98,-696.85 760.66,-696.85 772.47,-708.66 908.43,-708.66 1212.95,-708.66 1240.65,-736.36 2260,-736.36 ; 222.44,-673.23 685.98,-673.23 766.86,-673.23 778.67,-685.04 908.43,-685.04 1229.12,-685.04 1252.68,-708.61 2260,-708.61 ; 222.44,-649.61 777.32,-649.61 789.13,-661.42 908.43,-661.42 910.5,-659.34 1254.06,-659.34 1275.57,-680.85 2260,-680.85 ; 222.44,-625.98 790.66,-625.98 803.52,-638.85 1285.11,-638.85 1299.36,-653.09 2260,-653.09 ; 222.44,-602.36 808.16,-602.36 824.16,-618.36 1315.78,-618.36 1322.76,-625.34 2260,-625.34 ; 222.44,-578.74 819.15,-578.74 837.99,-597.58 2260,-597.58 ; 222.44,-531.5 841.68,-531.5 867.07,-556.89 2091.26,-556.89 2106.08,-542.07 2260,-542.07 ; 222.44,-507.87 852.66,-507.87 881.19,-536.4 2071.15,-536.4 2093.23,-514.31 2260,-514.31 ; 222.44,-484.25 861.41,-484.25 893.07,-515.91 2051.67,-515.91 2081.02,-486.56 2260,-486.56 ; 222.44,-460.63 867.14,-460.63 901.93,-495.42 2032.5,-495.42 2069.11,-458.8 2260,-458.8 ; 222.44,-413.39 887.12,-413.39 928.17,-454.44 1997.25,-454.44 2048.4,-403.29 2260,-403.29 ; 222.44,-389.76 894.19,-389.76 938.38,-433.95 1975.72,-433.95 2034.13,-375.54 2260,-375.54 ; 222.44,-366.14 902.34,-366.14 949.66,-413.46 1954.5,-413.46 2020.17,-347.78 2260,-347.78 ; 222.44,-318.9 915.47,-318.9 969.05,-372.48 1913.77,-372.48 1993.98,-292.27 2260,-292.27 ; 222.44,-271.65 933.62,-271.65 993.46,-331.5 1881.27,-331.5 1976.02,-236.76 2260,-236.76 ; 222.44,-248.03 942.53,-248.03 1005.5,-311.01 1864.88,-311.01 1966.89,-209 2260,-209 ; 222.44,-224.41 949.38,-224.41 1015.49,-290.52 1839.63,-290.52 1948.91,-181.24 2260,-181.24 ; 222.44,-200.79 958.31,-200.79 1027.55,-270.03 1812.03,-270.03 1928.57,-153.49 2260,-153.49 ; 222.44,-177.17 966.83,-177.17 1039.2,-249.54 1788.95,-249.54 1912.76,-125.73 2260,-125.73 ; 222.44,-129.92 988.24,-129.92 1066.88,-208.56 1280,-208.56 1509.73,-208.56 1764.17,-208.56 1902.5,-70.22 2260,-70.22 ; 222.44,-106.3 999.23,-106.3 1081,-188.07 1742.62,-188.07 1888.22,-42.46 2260,-42.46 ; 222.44,-82.68 1015.8,-82.68 1100.7,-167.58 1230,-167.58 1520,-167.58 1718.01,-167.58 1870.87,-14.71 2260,-14.71 ; 222.44,-35.43 1038.89,-35.43 1130.05,-126.6 1685.59,-126.6 1852.99,40.8 2260,40.8 ; v1(518.66,-1688.98) 589.53,-1618.11 700.47,-1618.11 712.28,-1629.92 938.47,-1629.92 ; v1(518.66,-1594.49) 589.53,-1523.62 700.47,-1523.62 712.28,-1535.43 938.47,-1535.43 ; v1(518.66,-1500) 589.53,-1429.13 700.47,-1429.13 712.28,-1440.94 938.47,-1440.94 ; v1(518.66,-1405.51) 589.53,-1334.65 700.47,-1334.65 712.28,-1346.46 938.47,-1346.46 ; v1(518.66,-1311.02) 589.53,-1240.16 700.47,-1240.16 712.28,-1251.97 938.47,-1251.97 ; v1(518.66,-1216.54) 589.53,-1145.67 700.47,-1145.67 712.28,-1157.48 938.47,-1157.48 ; v1(518.66,-1122.05) 589.53,-1051.18 700.47,-1051.18 712.28,-1062.99 938.47,-1062.99 ; v1(518.66,-1027.56) 589.53,-956.69 700.47,-956.69 712.28,-968.5 938.47,-968.5 ; v1(549.92,89.53) 575.45,64 1118.5,64 1268.11,-85.62 1655.38,-85.62 1837.31,96.32 2260,96.32 ; v1(554.09,-1688.98) 601.34,-1641.73 675.98,-1641.73 679.92,-1645.67 897.82,-1645.67 905.69,-1653.54 1255.21,-1653.54 1388.83,-1519.92 1703.09,-1519.92 1863.23,-1680.06 2260,-1680.06 ; v1(554.09,-1594.49) 601.34,-1547.24 675.98,-1547.24 679.92,-1551.18 897.82,-1551.18 905.34,-1558.71 ; v1(554.09,-1500) 601.34,-1452.76 675.98,-1452.76 679.92,-1456.69 897.82,-1456.69 905.34,-1464.22 938.47,-1464.22 ; v1(554.09,-1405.51) 601.34,-1358.27 675.98,-1358.27 679.92,-1362.2 897.82,-1362.2 905.34,-1369.73 938.47,-1369.73 ; v1(554.09,-1311.02) 601.34,-1263.78 675.98,-1263.78 679.92,-1267.72 897.82,-1267.72 905.34,-1275.24 938.47,-1275.24 ; v1(554.09,-1216.54) 601.34,-1169.29 675.98,-1169.29 679.92,-1173.23 897.82,-1173.23 905.34,-1180.75 938.47,-1180.75 ; v1(554.09,-1122.05) 601.34,-1074.8 675.98,-1074.8 679.92,-1078.74 897.82,-1078.74 905.34,-1086.26 938.47,-1086.26 ; v1(554.09,-1027.56) 601.34,-980.31 675.98,-980.31 679.92,-984.25 897.82,-984.25 905.34,-991.78 938.47,-991.78 ; v1(589.53,-1688.98) 613.15,-1665.35 675.98,-1665.35 679.92,-1661.42 875.92,-1661.42 891.66,-1677.17 938.47,-1677.17 ; v1(589.53,-1594.49) 613.15,-1570.87 675.98,-1570.87 679.92,-1566.93 875.92,-1566.93 891.66,-1582.68 938.47,-1582.68 ; v1(589.53,-1500) 613.15,-1476.38 675.98,-1476.38 679.92,-1472.44 875.92,-1472.44 891.66,-1488.19 938.47,-1488.19 ; v1(589.53,-1405.51) 613.15,-1381.89 675.98,-1381.89 679.92,-1377.95 875.92,-1377.95 891.66,-1393.7 938.47,-1393.7 ; v1(589.53,-1311.02) 613.15,-1287.4 675.98,-1287.4 679.92,-1283.46 875.92,-1283.46 891.66,-1299.21 1108.63,-1299.21 1195.27,-1212.57 1899.57,-1212.57 1950.72,-1263.72 2260,-1263.72 ; v1(589.53,-1216.54) 613.15,-1192.91 675.98,-1192.91 679.92,-1188.98 875.92,-1188.98 891.66,-1204.72 938.47,-1204.72 ; v1(589.53,-1122.05) 613.15,-1098.43 675.98,-1098.43 679.92,-1094.49 875.92,-1094.49 891.66,-1110.24 938.47,-1110.24 ; v1(589.53,-1027.56) 613.15,-1003.94 675.98,-1003.94 679.92,-1000 875.92,-1000 891.66,-1015.75 938.47,-1015.75 ; v1(624.96,-1688.98) 702.21,-1688.98 714.02,-1677.17 860.02,-1677.17 883.65,-1700.79 938.47,-1700.79 ; v1(624.96,-1594.49) 702.21,-1594.49 714.02,-1582.68 860.02,-1582.68 883.65,-1606.3 938.47,-1606.3 ; v1(624.96,-1500) 702.21,-1500 714.02,-1488.19 860.02,-1488.19 883.65,-1511.81 938.47,-1511.81 ; v1(624.96,-1405.51) 702.21,-1405.51 714.02,-1393.7 860.02,-1393.7 883.65,-1417.32 938.47,-1417.32 ; v1(624.96,-1311.02) 702.21,-1311.02 714.02,-1299.21 860.02,-1299.21 883.65,-1322.83 938.47,-1322.83 ; v1(624.96,-1216.54) 702.21,-1216.54 714.02,-1204.72 860.02,-1204.72 883.65,-1228.35 1084.56,-1228.35 1161.81,-1151.1 1943.57,-1151.1 1972.92,-1180.46 2260,-1180.46 ; v1(624.96,-1122.05) 702.21,-1122.05 714.02,-1110.24 860.02,-1110.24 883.65,-1133.86 938.47,-1133.86 ; v1(624.96,-1027.56) 702.21,-1027.56 714.02,-1015.75 860.02,-1015.75 883.65,-1039.37 938.47,-1039.37 ; v1(624.96,-933.07) 702.21,-933.07 714.02,-921.26 860.02,-921.26 883.65,-944.88 967.37,-944.88 1007.03,-905.22 1912.36,-905.22 1970.2,-847.39 2260,-847.39 ; 908.42,-1700.79 1273.37,-1700.79 1413.25,-1560.9 1659.22,-1560.9 1833.89,-1735.57 2260,-1735.57 ; 908.43,-1677.17 1263.37,-1677.17 1400.12,-1540.41 1680.63,-1540.41 1848.03,-1707.82 2260,-1707.82 ; 908.43,-1629.92 1240.69,-1629.92 1371.18,-1499.43 1712.98,-1499.43 1865.85,-1652.31 2260,-1652.31 ; 908.43,-1606.3 1228.23,-1606.3 1355.58,-1478.94 1733.35,-1478.94 1878.95,-1624.55 2260,-1624.55 ; 908.43,-1582.68 1220.27,-1582.68 1344.5,-1458.45 1744.28,-1458.45 1882.62,-1596.8 2260,-1596.8 ; 908.43,-1559.05 1213.55,-1559.05 1334.64,-1437.96 1753.12,-1437.96 1884.2,-1569.04 2260,-1569.04 ; 908.43,-1535.43 1202.52,-1535.43 1320.48,-1417.47 1766.07,-1417.47 1889.88,-1541.28 2260,-1541.28 ; 908.43,-1511.81 1193.34,-1511.81 1308.16,-1396.98 1777.09,-1396.98 1893.64,-1513.53 2260,-1513.53 ; 908.43,-1488.19 1187.84,-1488.19 1299.54,-1376.49 1785.94,-1376.49 1895.22,-1485.77 2260,-1485.77 ; 908.43,-1464.57 1175.58,-1464.57 1284.15,-1356 1795.83,-1356 1897.84,-1458.02 2260,-1458.02 ; 908.43,-1440.94 1162.09,-1440.94 1267.53,-1335.51 1815.7,-1335.51 1910.45,-1430.26 2260,-1430.26 ; 908.43,-1417.32 1151.88,-1417.32 1254.18,-1315.02 1831.32,-1315.02 1918.8,-1402.5 2260,-1402.5 ; 908.43,-1393.7 1139.62,-1393.7 1238.79,-1294.53 1841.47,-1294.53 1921.69,-1374.75 2260,-1374.75 ; 908.43,-1370.08 1130.85,-1370.08 1226.89,-1274.04 1856,-1274.04 1928.95,-1346.99 2260,-1346.99 ; 908.43,-1346.46 1122.08,-1346.46 1214.98,-1253.55 1873.8,-1253.55 1939.49,-1319.24 2260,-1319.24 ; 908.43,-1322.83 1114.53,-1322.83 1204.3,-1233.06 1885.15,-1233.06 1943.57,-1291.48 2260,-1291.48 ; 908.43,-1275.59 1095.75,-1275.59 1179.26,-1192.08 1918.47,-1192.08 1962.36,-1235.97 2260,-1235.97 ; 908.43,-1251.97 1090.67,-1251.97 1171.05,-1171.59 1929.23,-1171.59 1965.85,-1208.21 2260,-1208.21 ; 908.43,-1204.72 1078.04,-1204.72 1152.16,-1130.61 1962.05,-1130.61 1984.14,-1152.7 2260,-1152.7 ; 908.43,-1181.1 1071.32,-1181.1 1142.3,-1110.12 1975.48,-1110.12 1990.3,-1124.94 2260,-1124.94 ; 908.43,-1157.48 1066.65,-1157.48 1134.5,-1089.63 1990,-1089.63 1997.56,-1097.19 2260,-1097.19 ; 908.43,-1133.86 1052.75,-1133.86 1117.46,-1069.14 2059.71,-1069.14 2060,-1069.43 2260,-1069.43 ; 908.43,-1110.24 1045.41,-1110.24 1106.99,-1048.65 2053.03,-1048.65 2060,-1041.68 2260,-1041.68 ; 908.43,-1086.61 1037.45,-1086.61 1095.91,-1028.16 2034.66,-1028.16 2048.9,-1013.92 2260,-1013.92 ; 908.43,-1062.99 1023.55,-1062.99 1078.88,-1007.67 2013.57,-1007.67 2035.07,-986.17 2260,-986.17 ; 908.43,-1039.37 1013.96,-1039.37 1066.15,-987.18 1991.38,-987.18 2020.16,-958.41 2260,-958.41 ; 908.42,-1015.75 1002.78,-1015.75 1051.83,-966.69 1969.58,-966.69 2005.61,-930.65 2260,-930.65 ; 908.42,-992.13 992.48,-992.13 1038.4,-946.2 1950.54,-946.2 1993.84,-902.9 2260,-902.9 ; 908.42,-968.5 981.88,-968.5 1024.67,-925.71 1930.3,-925.71 1980.87,-875.14 2260,-875.14 ; 5532.87,-626.34 5701.55,-626.34 6410,-834 ; 5532.87,-98.98 5985.93,-98.98 6410,-834 ; 5532.87,-43.46 6034.95,-43.46 6410,-834 ; 5532.87,39.72 6117.7,40.8 6400.15,-804.53 6410,-834 ; 5532.87,95.32 6180.49,95.32 6401.87,-801.07 ; 5532.88,-1763.32 6180.49,-1763.32 6401.87,-866.94 ; 5532.88,-1735.57 6148.51,-1735.57 6400.94,-865.24 6401.24,-864.21 6410,-834 ; 5532.88,-1708.81 6117.7,-1708.81 6400.15,-863.47 6400.49,-862.47 6410,-834 ; 5532.88,-1680.06 6088.99,-1680.06 6399.51,-861.65 6399.88,-860.67 6410,-834 ; 5532.88,-1652.3 6061.32,-1652.3 6399.02,-859.78 6399.42,-858.83 6410,-834 ; 5532.88,-1624.54 6034.95,-1624.54 6410,-834 ; 5532.88,-1596.79 6012.68,-1596.79 6410,-834 ; 5532.88,-1569.03 5985.93,-1569.03 6410,-834 ; 5532.88,-1541.28 5963.16,-1541.28 6410,-834 ; 5532.88,-1513.52 5941.51,-1513.52 6410,-834 ; 5532.88,-1485.76 5920.92,-1485.76 6410,-834 ; 5532.88,-1458.01 5901.35,-1458.01 6410,-834 ; 5532.88,-1430.25 5882.76,-1430.25 6410,-834 ; 5532.88,-1402.5 5865.13,-1402.5 6410,-834 ; 5532.88,-1374.74 5847.23,-1374.74 6410,-834 ; 5532.88,-1346.98 5832.55,-1346.98 6410,-834 ; 5532.88,-1319.23 5817.53,-1319.23 6410,-834 ; 5532.88,-1291.47 5802.37,-1291.47 6410,-834 ; 5532.88,-1263.72 5789.87,-1263.72 6410,-834 ; 5532.88,-1235.97 5580,-1235.96 5777.13,-1235.96 6410,-834 ; 5532.88,-1208.21 5639.06,-1208.2 5765.06,-1208.2 6410,-834 ; 5532.88,-1180.46 5580,-1180.45 5753.59,-1180.45 6410,-834 ; 5532.88,-1152.7 5639.06,-1152.69 5742.65,-1152.69 6410,-834 ; 5532.88,-1124.94 5580,-1124.94 5732.15,-1124.94 5742.65,-1120.41 6410,-834 ; 5532.88,-1097.19 5639.06,-1097.18 5721.94,-1097.18 6410,-834 ; 5532.88,-1069.43 5580,-1069.43 5711.84,-1069.43 6410,-834 ; 5532.88,-1041.68 5639.06,-1041.67 5701.55,-1041.67 6410,-834 ; 5532.88,-1013.92 5580,-1013.91 5690.58,-1013.91 6410,-834 ; 5532.88,-986.17 5639.06,-986.16 5678.1,-986.16 6410,-834 ; 5532.88,-958.41 5580,-958.4 5662.44,-958.4 6410,-834 ; 5532.88,-930.65 5639.06,-930.65 5639.81,-930.65 6410,-834 ; 5532.88,-902.9 5580,-903.9 5631.97,-903.9 6410,-834 ; 5532.88,-875.14 5639.06,-876.14 6410,-834 ; 5532.88,-847.39 5639.05,-847.36 6410,-834 ; 5532.88,-819.63 5639.06,-820.63 6410,-834 ; 5532.88,-791.87 5580,-792.87 6410,-834 ; 5532.88,-764.12 5580.05,-763.56 6410,-834 ; 5532.88,-737.36 5639.81,-737.36 6410,-834 ; 5532.88,-709.61 5662.44,-709.61 6410,-834 ; 5532.88,-681.85 5678.1,-681.85 6410,-834 ; 5532.88,-654.09 5690.58,-654.09 6410,-834 ; 5532.88,-598.58 5711.84,-598.58 6410,-834 ; 5532.88,-570.83 5721.94,-570.83 6410,-834 ; 5532.88,-543.07 5732.15,-543.07 5742.65,-547.59 6410,-834 ; 5532.88,-515.31 5742.65,-515.31 6410,-834 ; 5532.88,-487.56 5753.59,-487.56 6410,-834 ; 5532.88,-459.8 5765.06,-459.8 6410,-834 ; 5532.88,-432.05 5777.13,-432.05 6410,-834 ; 5532.88,-404.29 5789.87,-404.29 6410,-834 ; 5532.88,-376.54 5802.37,-376.54 6410,-834 ; 5532.88,-348.78 5817.53,-348.78 6410,-834 ; 5532.88,-321.02 5832.55,-321.02 6410,-834 ; 5532.88,-293.27 5847.23,-293.27 6410,-834 ; 5532.88,-265.51 5865.13,-265.51 6410,-834 ; 5532.88,-237.76 5882.76,-237.76 6410,-834 ; 5532.88,-210 5901.35,-210 6410,-834 ; 5532.88,-182.24 5920.92,-182.24 6410,-834 ; 5532.88,-154.49 5941.51,-154.49 6410,-834 ; 5532.88,-126.73 5963.16,-126.73 6410,-834 ; 5532.88,-71.22 6012.68,-71.22 6410,-834 ; 5532.88,-15.71 6061.32,-15.71 6399.02,-808.23 6410,-834 ; 5532.88,12.05 6088.99,12.05 6399.51,-806.36 6410,-834 ; 5532.88,67.56 6148.51,67.56 6400.94,-802.77 6410,-834 ; 6401.87,-866.94 6402.13,-865.88 ; 6401.87,-866.94 6402.13,-865.89 ; 6401.87,-801.07 6410,-834 ; 6401.87,-801.07 6410,-834 ; 6402.13,-865.89 6410,-834 ; 6402.13,-865.88 6410,-834
  Signal Layer 1 w12: 2260,-1763.33 5532.88,-1763.33 ; 2260,-1735.57 5532.88,-1735.57 ; 2260,-1707.82 5532.88,-1707.82 ; 2260,-1680.06 5532.88,-1680.06 ; 2260,-1652.31 5532.88,-1652.31 ; 2260,-1624.55 5532.88,-1624.55 ; 2260,-1596.8 5532.88,-1596.8 ; 2260,-1569.04 5532.88,-1569.04 ; 2260,-1541.28 5532.88,-1541.28 ; 2260,-1513.53 5532.88,-1513.53 ; 2260,-1485.77 5532.88,-1485.77 ; 2260,-1458.02 5532.88,-1458.02 ; 2260,-1430.26 5532.88,-1430.26 ; 2260,-1402.5 5532.88,-1402.5 ; 2260,-1374.75 5532.88,-1374.75 ; 2260,-1346.99 5532.88,-1346.99 ; 2260,-1319.24 5532.88,-1319.24 ; 2260,-1291.48 5532.88,-1291.48 ; 2260,-1263.72 5532.88,-1263.72 ; 2260,-1235.97 5532.88,-1235.97 ; 2260,-1208.21 5532.88,-1208.21 ; 2260,-1180.46 5532.88,-1180.46 ; 2260,-1152.7 5532.88,-1152.7 ; 2260,-1124.94 5532.88,-1124.94 ; 2260,-1097.19 5532.88,-1097.19 ; 2260,-1069.43 5532.88,-1069.43 ; 2260,-1041.68 5532.88,-1041.68 ; 2260,-1013.92 5532.88,-1013.92 ; 2260,-986.17 5532.88,-986.17 ; 2260,-958.41 5532.88,-958.41 ; 2260,-930.65 5532.88,-930.65 ; 2260,-902.9 5532.88,-902.9 ; 2260,-875.14 5532.88,-875.14 ; 2260,-847.39 5532.88,-847.39 ; 2260,-819.63 5532.88,-819.63 ; 2260,-791.87 5532.88,-791.87 ; 2260,-764.12 5532.88,-764.12 ; 2260,-736.36 5532.88,-736.36 ; 2260,-708.61 5532.88,-708.61 ; 2260,-680.85 5532.88,-680.85 ; 2260,-653.09 5532.88,-653.09 ; 2260,-625.34 5532.88,-625.34 ; 2260,-597.58 5532.88,-597.58 ; 2260,-569.83 5532.88,-569.83 ; 2260,-542.07 5532.88,-542.07 ; 2260,-514.31 5532.88,-514.31 ; 2260,-486.56 5532.88,-486.56 ; 2260,-458.8 5532.88,-458.8 ; 2260,-431.05 5532.88,-431.05 ; 2260,-403.29 5532.88,-403.29 ; 2260,-375.54 5532.88,-375.54 ; 2260,-347.78 5532.88,-347.78 ; 2260,-320.02 5532.88,-320.02 ; 2260,-292.27 5532.88,-292.27 ; 2260,-264.51 5532.88,-264.51 ; 2260,-236.76 5532.88,-236.76 ; 2260,-209 5532.88,-209 ; 2260,-181.24 5532.88,-181.24 ; 2260,-153.49 5532.88,-153.49 ; 2260,-125.73 5532.88,-125.73 ; 2260,-97.98 5532.88,-97.98 ; 2260,-70.22 5532.88,-70.22 ; 2260,-42.46 5532.88,-42.46 ; 2260,-14.71 5532.88,-14.71 ; 2260,13.05 5532.88,13.05 ; 2260,40.8 5532.88,40.8 ; 2260,68.56 5532.88,68.56 ; 2260,96.32 5532.88,96.32
  Signal Layer 1 w40: pad.0@6369.25,-1395.47 6465.42,-1395.47 6505.89,-1354.99 6505.89,-919.52 6419.89,-833.52 6412.37,-833.52